# Altium PCB CellVoltageControl.PcbDoc (part 1 of 3)
Units mm, origin at the board's own origin, x right, y up, seen from the top; angles counter-clockwise.
Board outline 100.01 x 50.02 mm, 2 copper layers (Top Layer, Bottom Layer); 240 components, 246 nets, 730 pads, 332 vias.
Unrouted connection lines stored in the file: 5.
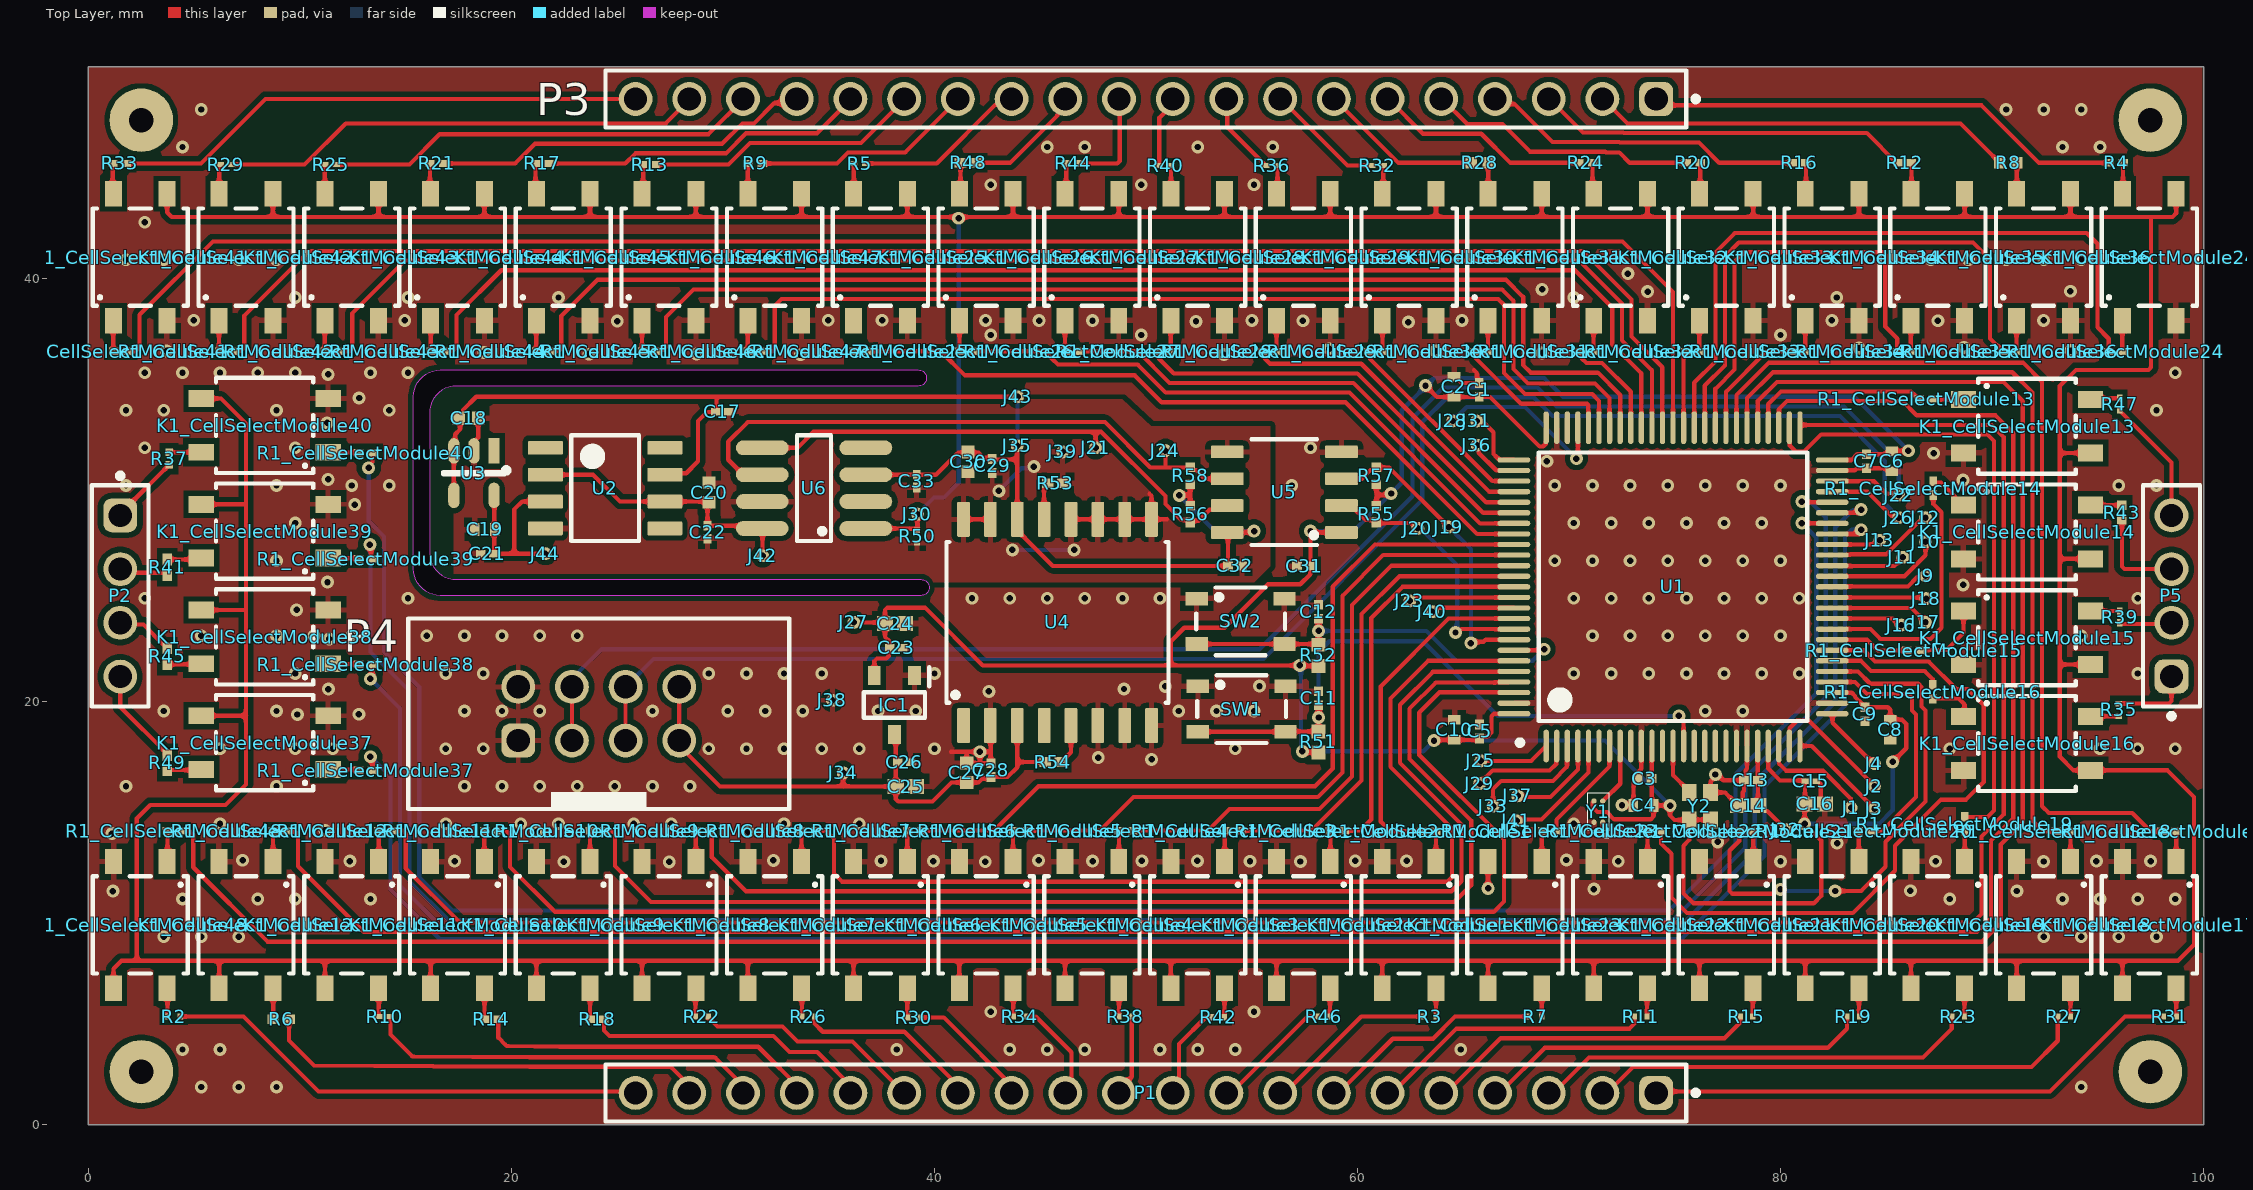
[diagram p0: Top Layer view]
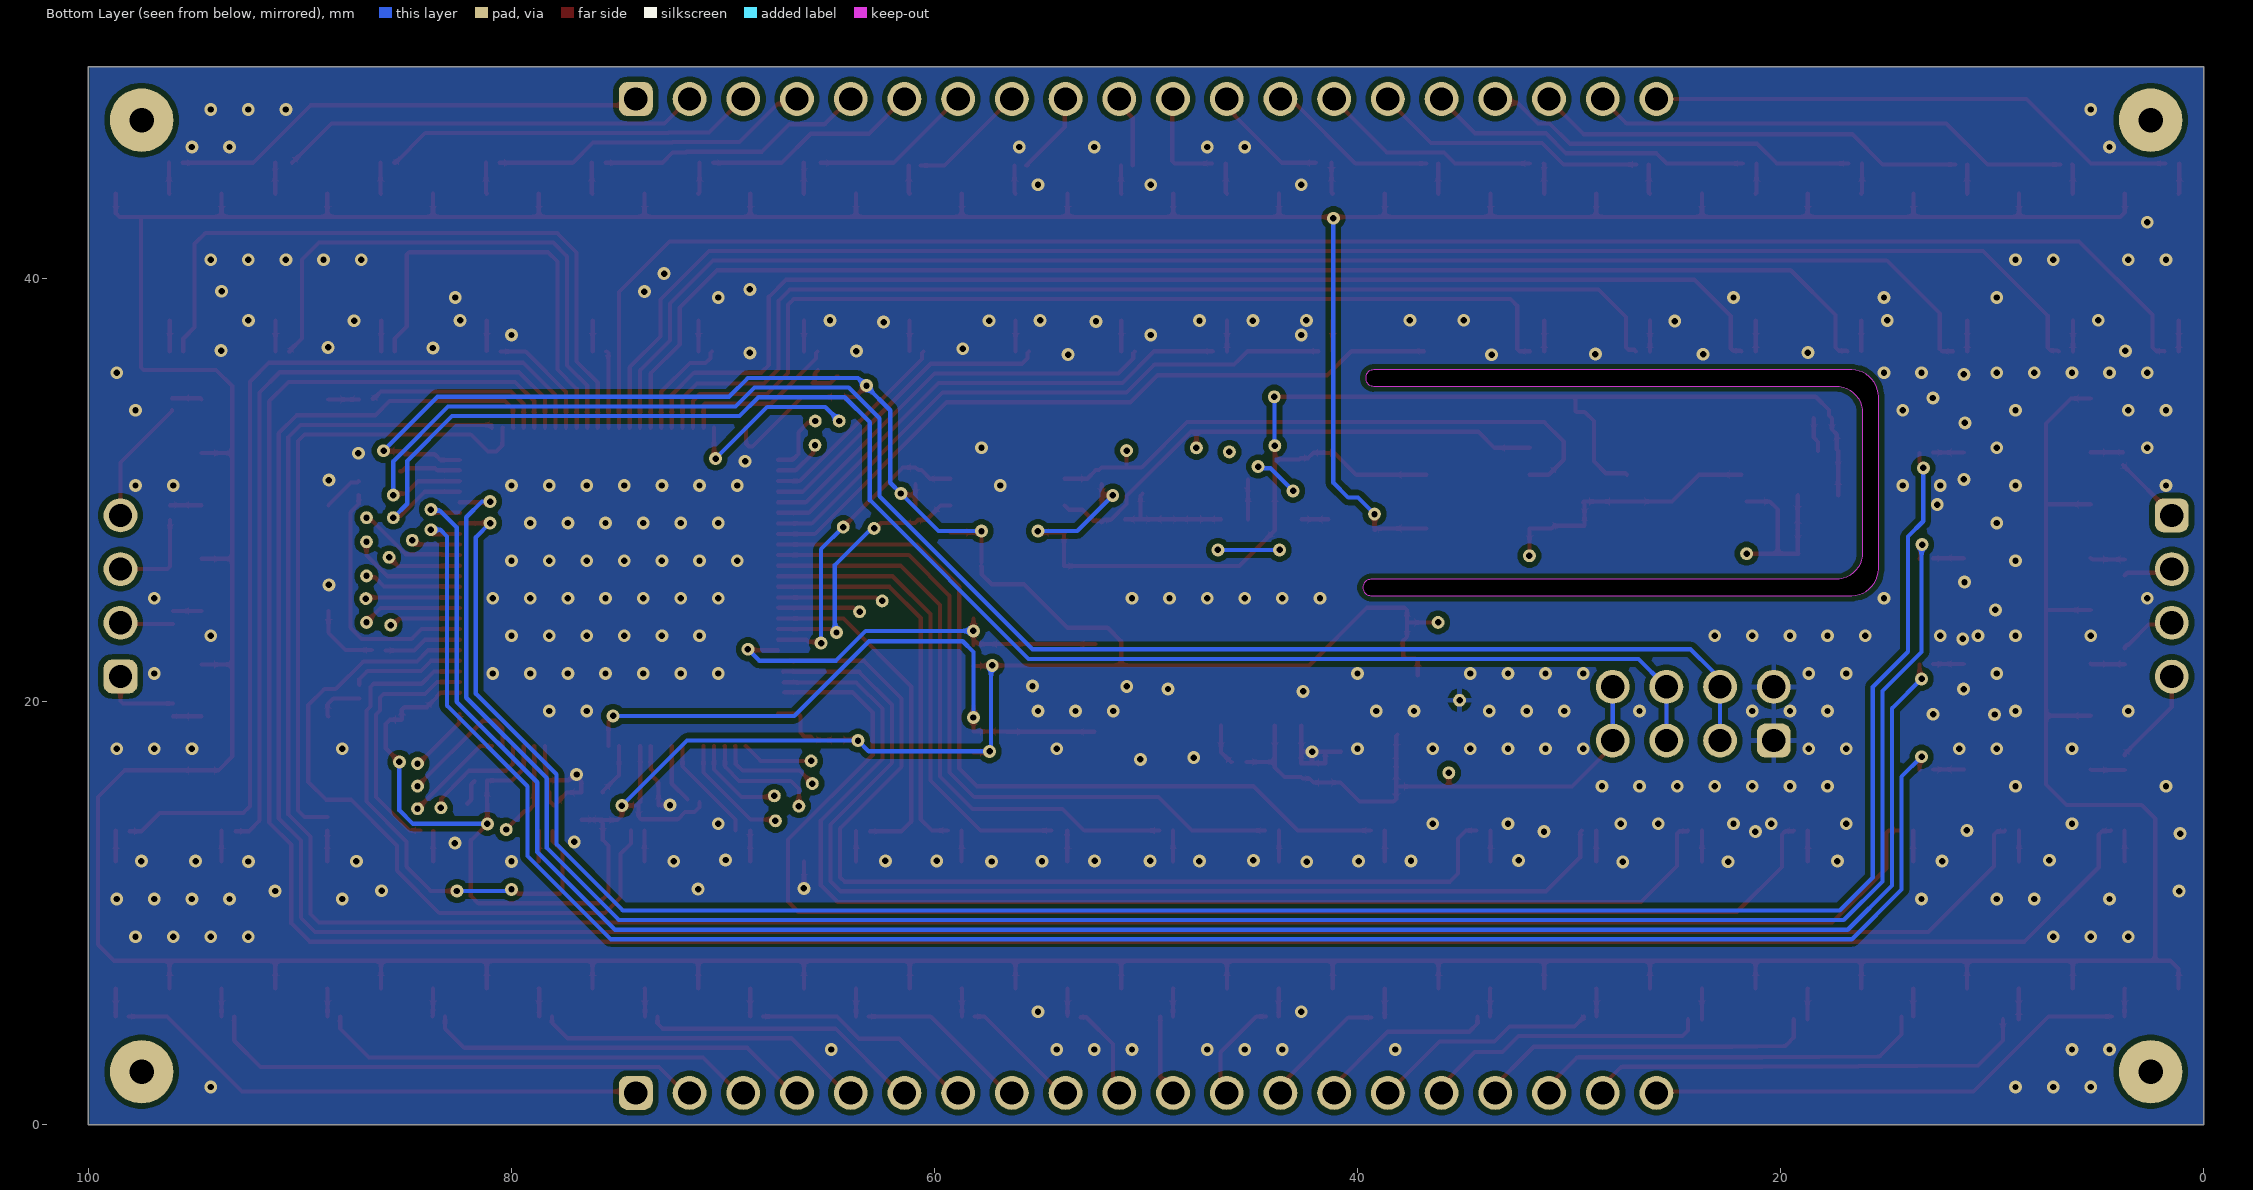
[diagram p1: Bottom Layer view, seen from below]

## Layer stack, top to bottom
Top Solder: solder mask 0.0102, Solder Resist, Dk 3.5
Top Layer: signal copper 0.0356
Dielectric 1: dielectric 0.32, FR-4, Dk 4.8
Bottom Layer: signal copper 0.0356
Bottom Solder: solder mask 0.0102, Solder Resist, Dk 3.5

## Board outline
0,0 100.015,0 100.015,50.021 0,50.021
cut-out: 15.367,26.289 15.367,34.417 cw(c16.637,34.417) 16.637,35.687 39.243,35.687 cw(c39.243,35.306) 39.624,35.306 cw(c39.243,35.306) 39.243,34.925 17.399,34.925 ccw(c17.399,33.655) 16.129,33.655 16.129,27.051 ccw(c17.399,27.051) 17.399,25.781 39.37,25.781 cw(c39.37,25.4) 39.751,25.4 cw(c39.37,25.4) 39.37,25.019 16.637,25.019 cw(c16.637,26.289)

## Design rules (kind name [scope] priority, off if disabled: settings)
Clearance [All] p1: gap=0.254 ignorepadtopadclearanceinfootprint=TRUE except(0: Arc-Hole Track-Hole SMDPad-Hole THPad-Hole Via-Hole Fill-Hole Poly-Hole Region-Hole Text-Hole)
PolygonConnect [All] p1: connectstyle=Relief reliefconductorwidth=0.254 reliefentries=4 polygonreliefangle="90 Angle" airgapwidth=0.254
RoutingVias [All] p1: holewidth=0.305 width=0.61 viastyle="Through Hole" minholewidth=0.3 minwidth=0.6 maxholewidth=1.27 maxwidth=2.54
SolderMaskExpansion [All] p1: expansion=0.102 istentingtop=FALSE
Width [All] p1: maxlimit=12.5 minlimit=0.2 preferedwidth=0.2
30 further rules are at their usual default settings.

## Classes and differential pairs
component class ISO_I2C: C31 C32 R55 R56 R57 R58 U5
component class ISO_5V: C27 C28 C29 C30 R53 R54 U4
component class CellSelectModule6: K1_CellSelectModule6 R1_CellSelectModule6
component class ADC: C33 U6
component class CellSelectModule10: K1_CellSelectModule10 R1_CellSelectModule10
component class LDO_3V3: C23 C24 C25 C26 IC1
component class CellSelectModule48: K1_CellSelectModule48 R1_CellSelectModule48
component class Vref-2v5: C17 C18 C19 C20 C21 C22 J42 J43 J44 U2 U3
channel class CellSelectModule: CellSelectModule1 CellSelectModule2 CellSelectModule3 CellSelectModule4 CellSelectModule5 CellSelectModule6 CellSelectModule7 CellSelectModule8 CellSelectModule9 CellSelectModule10 CellSelectModule11 CellSelectModule12 CellSelectModule13 CellSelectModule14 CellSelectModule15 CellSelectModule16 CellSelectModule17 CellSelectModule18 CellSelectModule19 CellSelectModule20 CellSelectModule21 CellSelectModule22 CellSelectModule23 CellSelectModule24 CellSelectModule25 CellSelectModule26 CellSelectModule27 CellSelectModule28 CellSelectModule29 CellSelectModule30 CellSelectModule31 CellSelectModule32 CellSelectModule33 CellSelectModule34 CellSelectModule35 CellSelectModule36 CellSelectModule37 CellSelectModule38 CellSelectModule39 CellSelectModule40 CellSelectModule41 CellSelectModule42 CellSelectModule43 CellSelectModule44 CellSelectModule45 CellSelectModule46 CellSelectModule47 CellSelectModule48
component class CellVoltageControl: C1 C2 C3 C4 C5 C6 C7 C8 C9 C10 C11 C12 C13 C14 C15 C16 J1 J2 J3 J4 J9 J10 J11 J12 J13 J16 J17 J18 J19 J20 J21 J22 J23 J24 J25 J26 J27 J28 J29 J30 J31 J32 J33 J34 J35 J36 J37 J38 J39 J40 J41 P1 P2 P3 P4 P5 R2 R3 R4 R5 R6 R7 R8 R9 R10 R11 R12 R13 R14 R15 R16 R17 R18 R19 R20 R21 R22 R23 R24 R25 R26 R27 R28 R29 R30 R31 R32 R33 R34 R35 R36 R37 R38 R39 R40 R41 R42 R43 R44 R45 R46 R47 R48 R49 R50 R51 R52 SW1 SW2 U1 Y1 Y2
component class CellSelectModule37: K1_CellSelectModule37 R1_CellSelectModule37
component class CellSelectModule47: K1_CellSelectModule47 R1_CellSelectModule47
component class CellSelectModule46: K1_CellSelectModule46 R1_CellSelectModule46
component class CellSelectModule45: K1_CellSelectModule45 R1_CellSelectModule45
component class CellSelectModule44: K1_CellSelectModule44 R1_CellSelectModule44
component class CellSelectModule43: K1_CellSelectModule43 R1_CellSelectModule43
component class CellSelectModule42: K1_CellSelectModule42 R1_CellSelectModule42
component class CellSelectModule41: K1_CellSelectModule41 R1_CellSelectModule41
component class CellSelectModule40: K1_CellSelectModule40 R1_CellSelectModule40
component class CellSelectModule39: K1_CellSelectModule39 R1_CellSelectModule39
component class CellSelectModule38: K1_CellSelectModule38 R1_CellSelectModule38
component class CellSelectModule36: K1_CellSelectModule36 R1_CellSelectModule36
component class CellSelectModule35: K1_CellSelectModule35 R1_CellSelectModule35
component class CellSelectModule34: K1_CellSelectModule34 R1_CellSelectModule34
component class CellSelectModule33: K1_CellSelectModule33 R1_CellSelectModule33
component class CellSelectModule32: K1_CellSelectModule32 R1_CellSelectModule32
component class CellSelectModule31: K1_CellSelectModule31 R1_CellSelectModule31
component class CellSelectModule30: K1_CellSelectModule30 R1_CellSelectModule30
component class CellSelectModule29: K1_CellSelectModule29 R1_CellSelectModule29
component class CellSelectModule28: K1_CellSelectModule28 R1_CellSelectModule28
component class CellSelectModule27: K1_CellSelectModule27 R1_CellSelectModule27
component class CellSelectModule26: K1_CellSelectModule26 R1_CellSelectModule26
component class CellSelectModule25: K1_CellSelectModule25 R1_CellSelectModule25
component class CellSelectModule24: K1_CellSelectModule24 R1_CellSelectModule24
component class CellSelectModule23: K1_CellSelectModule23 R1_CellSelectModule23
component class CellSelectModule22: K1_CellSelectModule22 R1_CellSelectModule22
component class CellSelectModule21: K1_CellSelectModule21 R1_CellSelectModule21
component class CellSelectModule20: K1_CellSelectModule20 R1_CellSelectModule20
component class CellSelectModule19: K1_CellSelectModule19 R1_CellSelectModule19
component class CellSelectModule18: K1_CellSelectModule18 R1_CellSelectModule18
component class CellSelectModule17: K1_CellSelectModule17 R1_CellSelectModule17
component class CellSelectModule16: K1_CellSelectModule16 R1_CellSelectModule16
component class CellSelectModule15: K1_CellSelectModule15 R1_CellSelectModule15
component class CellSelectModule14: K1_CellSelectModule14 R1_CellSelectModule14
component class CellSelectModule13: K1_CellSelectModule13 R1_CellSelectModule13
component class CellSelectModule12: K1_CellSelectModule12 R1_CellSelectModule12
component class CellSelectModule11: K1_CellSelectModule11 R1_CellSelectModule11
component class CellSelectModule9: K1_CellSelectModule9 R1_CellSelectModule9
component class CellSelectModule7: K1_CellSelectModule7 R1_CellSelectModule7
component class CellSelectModule8: K1_CellSelectModule8 R1_CellSelectModule8
component class CellSelectModule5: K1_CellSelectModule5 R1_CellSelectModule5
component class CellSelectModule4: K1_CellSelectModule4 R1_CellSelectModule4
component class CellSelectModule3: K1_CellSelectModule3 R1_CellSelectModule3
component class CellSelectModule2: K1_CellSelectModule2 R1_CellSelectModule2
component class CellSelectModule1: K1_CellSelectModule1 R1_CellSelectModule1

## Components (designator, comment, footprint, x,y, rotation, side; value= is the part's Value field where it differs from the comment)
C1 "100 nF, 25V, X6S, 0201" CAPC0603X33N 65.765,34.744 r90 top
C2 "4.7 uF, 25V, X5S, 0402" GRM15X 64.567,34.889 r270 top
C3 "100 nF, 25V, X6S, 0201" CAPC0603X33N 73.58,16.368 r180 top
C4 "4.7 uF, 25V, X5S, 0402" GRM15X 73.533,15.092 r0 top
C5 "100 nF, 25V, X6S, 0201" CAPC0603X33N 65.786,18.593 r90 top
C6 "4.7 uF, 25V, X5S, 0402" GRM15X 85.271,31.369 r90 top
C7 "100 nF, 25V, X6S, 0201" CAPC0603X33N 84.074,31.369 r270 top
C8 "4.7 uF, 25V, X5S, 0402" GRM15X 85.2,18.674 r90 top
C9 "100 nF, 25V, X6S, 0201" CAPC0603X33N 84.003,19.408 r270 top
C10 "4.7 uF, 25V, X5S, 0402" GRM15X 64.589,18.669 r270 top
C11 "100 nF, 25V, X6S, 0201" CAPC0603X33N 58.166,20.16 r90 top
C12 "100 nF, 25V, X6S, 0201" CAPC0603X33N 58.162,24.255 r90 top
C13 "100 nF, 25V, X6S, 0201" CAPC0603X33N 78.613,16.285 r180 top
C14 "1uF, 25V, X6S, 0402" FP-GRT155-0_1-IPC_A 78.486,15.09 r180 top
C15 "10nF, 25V, X5R, 0201" FP-GRM033-0_03-IPC_C 81.445,16.248 r0 top
C16 "1uF, 25V, X6S, 0402" FP-GRT155-0_1-IPC_A 81.629,15.172 r0 top
C17 "100nF, 25v, X6S, 0201" FP-GRM033-0_03-IPC_B 29.972,33.71 r0 top
C18 "10 uF, 25V, X6S, 0402" CAPC1005X70N 17.971,33.401 r0 top
C19 "4.7 uF, 25V, X5S, 0402" GRM15X 18.733,28.143 r0 top
C20 "10 uF, 25V, X6S, 0402" CAPC1005X70N 29.346,29.887 r270 top
C21 "100nF, 25v, X6S, 0201" FP-GRM033-0_03-IPC_B 18.86,27 r180 top
C22 "100nF, 25v, X6S, 0201" FP-GRM033-0_03-IPC_B 29.274,28.017 r270 top
C23 "100nF, 25v, X6S, 0201" FP-GRM033-0_03-IPC_B 38.191,22.552 r0 top
C24 "1uF, 25V, X6S, 0402" FP-GRT155-0_1-IPC_A 38.141,23.694 r0 top
C25 "1uF, 25V, X6S, 0402" FP-GRT155-0_1-IPC_A 38.649,15.989 r0 top
C26 "100nF, 25v, X6S, 0201" FP-GRM033-0_03-IPC_B 38.572,17.131 r0 top
C27 "10 uF, 25V, X6S, 0402" CAPC1005X70N 41.529,16.637 r270 top
C28 "100 nF, 25V, X6S, 0201" CAPC0603X33N 42.672,16.764 r270 top
C29 "100 nF, 25V, X6S, 0201" CAPC0603X33N 42.736,31.146 r270 top
C30 "10 uF, 25V, X6S, 0402" CAPC1005X70N 41.593,31.346 r270 top
C31 "100 nF, 25V, X6S, 0201" CAPC0603X33N 57.48,26.416 r180 top
C32 "100 nF, 25V, X6S, 0201" CAPC0603X33N 54.212,26.42 r0 top
C33 "100nF, 25v, X6S, 0201" FP-GRM033-0_03-IPC_B 39.161,30.434 r270 top
IC1 "XC6206P332MR" SOT95P280X130-3N 38.111,19.842 r270 top
J1 "TestPad" TestPad 83.346,14.986 r0 top
J2 "TestPad" TestPad 84.455,16.007 r0 top
J3 "TestPad" TestPad 84.455,14.94 r0 top
J4 "TestPad" TestPad 84.455,17.074 r0 top
J9 "TestPad" TestPad 86.868,25.946 r270 top
J10 "TestPad" TestPad 86.868,27.559 r270 top
J11 "TestPad" TestPad 85.801,26.826 r270 top
J12 "TestPad" TestPad 86.868,28.702 r270 top
J13 "TestPad" TestPad 84.705,27.635 r270 top
J16 "TestPad" TestPad 85.725,23.622 r90 top
J17 "TestPad" TestPad 86.868,23.749 r90 top
J18 "TestPad" TestPad 86.897,24.878 r90 top
J19 "TestPad" TestPad 64.325,28.258 r180 top
J20 "TestPad" TestPad 62.865,28.194 r180 top
J21 "TestPad" TestPad 47.625,32.004 r180 top
J22 "TestPad" TestPad 85.598,29.769 r0 top
J23 "TestPad" TestPad 62.484,24.765 r90 top
J24 "TestPad" TestPad 50.927,31.877 r0 top
J25 "TestPad" TestPad 65.844,17.197 r90 top
J26 "TestPad" TestPad 85.598,28.702 r0 top
J27 "TestPad" TESTPAD#1 36.195,23.749 r0 top
J28 "TestPad" TestPad 64.516,33.274 r90 top
J29 "TestPad" TestPad 65.786,16.129 r90 top
J30 "TestPad" TESTPAD#1 39.202,28.872 r180 top
J31 "TestPad" TestPad 65.645,33.274 r90 top
J32 "TestPad" TESTPAD#1 80.264,13.956 r180 top
J33 "TestPad" TestPad 66.421,15.062 r90 top
J34 "TestPad" TESTPAD#1 35.687,16.637 r180 top
J35 "TestPad" TESTPAD#1 43.914,32.107 r180 top
J36 "TestPad" TestPad 65.659,32.131 r90 top
J37 "TestPad" TestPad 67.582,15.549 r90 top
J38 "TestPad" TESTPAD#1 35.179,20.066 r0 top
J39 "TestPad" TESTPAD#1 46.065,31.814 r0 top
J40 "TestPad" TestPad 63.551,24.257 r0 top
J41 "TestPad" TestPad 67.531,14.365 r90 top
J42 "TestPad" TESTPAD#2 31.877,27.15 r0 top
J43 "TestPad" TESTPAD#1 43.942,34.417 r180 top
J44 "TestPad" TESTPAD#1 21.606,27 r0 top
K1_CellSelectModule1 "AQY280SX" FP-AQY280SX-MFG 62.45,9.444 r270 top (schematic designator K1)
K1_CellSelectModule2 "AQY280SX" FP-AQY280SX-MFG 57.45,9.444 r270 top (schematic designator K1)
K1_CellSelectModule3 "AQY280SX" FP-AQY280SX-MFG 52.45,9.444 r270 top (schematic designator K1)
K1_CellSelectModule4 "AQY280SX" FP-AQY280SX-MFG 47.45,9.444 r270 top (schematic designator K1)
K1_CellSelectModule5 "AQY280SX" FP-AQY280SX-MFG 42.45,9.444 r270 top (schematic designator K1)
K1_CellSelectModule6 "AQY280SX" FP-AQY280SX-MFG 37.45,9.444 r270 top (schematic designator K1)
K1_CellSelectModule7 "AQY280SX" FP-AQY280SX-MFG 32.45,9.444 r270 top (schematic designator K1)
K1_CellSelectModule8 "AQY280SX" FP-AQY280SX-MFG 27.45,9.444 r270 top (schematic designator K1)
K1_CellSelectModule9 "AQY280SX" FP-AQY280SX-MFG 22.45,9.444 r270 top (schematic designator K1)
K1_CellSelectModule10 "AQY280SX" FP-AQY280SX-MFG 17.45,9.444 r270 top (schematic designator K1)
K1_CellSelectModule11 "AQY280SX" FP-AQY280SX-MFG 12.45,9.444 r270 top (schematic designator K1)
K1_CellSelectModule12 "AQY280SX" FP-AQY280SX-MFG 7.45,9.444 r270 top (schematic designator K1)
K1_CellSelectModule13 "AQY280SX" FP-AQY280SX-MFG 91.667,33.025 r0 top (schematic designator K1)
K1_CellSelectModule14 "AQY280SX" FP-AQY280SX-MFG 91.667,28.025 r0 top (schematic designator K1)
K1_CellSelectModule15 "AQY280SX" FP-AQY280SX-MFG 91.667,23.025 r0 top (schematic designator K1)
K1_CellSelectModule16 "AQY280SX" FP-AQY280SX-MFG 91.667,18.025 r0 top (schematic designator K1)
K1_CellSelectModule17 "AQY280SX" FP-AQY280SX-MFG 97.45,9.444 r270 top (schematic designator K1)
K1_CellSelectModule18 "AQY280SX" FP-AQY280SX-MFG 92.45,9.444 r270 top (schematic designator K1)
K1_CellSelectModule19 "AQY280SX" FP-AQY280SX-MFG 87.45,9.444 r270 top (schematic designator K1)
K1_CellSelectModule20 "AQY280SX" FP-AQY280SX-MFG 82.45,9.444 r270 top (schematic designator K1)
K1_CellSelectModule21 "AQY280SX" FP-AQY280SX-MFG 77.45,9.444 r270 top (schematic designator K1)
K1_CellSelectModule22 "AQY280SX" FP-AQY280SX-MFG 72.45,9.444 r270 top (schematic designator K1)
K1_CellSelectModule23 "AQY280SX" FP-AQY280SX-MFG 67.45,9.444 r270 top (schematic designator K1)
K1_CellSelectModule24 "AQY280SX" FP-AQY280SX-MFG 97.45,41.021 r90 top (schematic designator K1)
K1_CellSelectModule25 "AQY280SX" FP-AQY280SX-MFG 37.45,41.021 r90 top (schematic designator K1)
K1_CellSelectModule26 "AQY280SX" FP-AQY280SX-MFG 42.45,41.021 r90 top (schematic designator K1)
K1_CellSelectModule27 "AQY280SX" FP-AQY280SX-MFG 47.45,41.021 r90 top (schematic designator K1)
K1_CellSelectModule28 "AQY280SX" FP-AQY280SX-MFG 52.45,41.021 r90 top (schematic designator K1)
K1_CellSelectModule29 "AQY280SX" FP-AQY280SX-MFG 57.45,41.021 r90 top (schematic designator K1)
K1_CellSelectModule30 "AQY280SX" FP-AQY280SX-MFG 62.45,41.021 r90 top (schematic designator K1)
K1_CellSelectModule31 "AQY280SX" FP-AQY280SX-MFG 67.45,41.021 r90 top (schematic designator K1)
K1_CellSelectModule32 "AQY280SX" FP-AQY280SX-MFG 72.45,41.021 r90 top (schematic designator K1)
K1_CellSelectModule33 "AQY280SX" FP-AQY280SX-MFG 77.45,41.021 r90 top (schematic designator K1)
K1_CellSelectModule34 "AQY280SX" FP-AQY280SX-MFG 82.45,41.021 r90 top (schematic designator K1)
K1_CellSelectModule35 "AQY280SX" FP-AQY280SX-MFG 87.45,41.021 r90 top (schematic designator K1)
K1_CellSelectModule36 "AQY280SX" FP-AQY280SX-MFG 92.45,41.021 r90 top (schematic designator K1)
K1_CellSelectModule37 "AQY280SX" FP-AQY280SX-MFG 8.335,18.064 r180 top (schematic designator K1)
K1_CellSelectModule38 "AQY280SX" FP-AQY280SX-MFG 8.335,23.064 r180 top (schematic designator K1)
K1_CellSelectModule39 "AQY280SX" FP-AQY280SX-MFG 8.335,28.064 r180 top (schematic designator K1)
K1_CellSelectModule40 "AQY280SX" FP-AQY280SX-MFG 8.335,33.064 r180 top (schematic designator K1)
K1_CellSelectModule41 "AQY280SX" FP-AQY280SX-MFG 2.45,41.021 r90 top (schematic designator K1)
K1_CellSelectModule42 "AQY280SX" FP-AQY280SX-MFG 7.45,41.021 r90 top (schematic designator K1)
K1_CellSelectModule43 "AQY280SX" FP-AQY280SX-MFG 12.45,41.021 r90 top (schematic designator K1)
K1_CellSelectModule44 "AQY280SX" FP-AQY280SX-MFG 17.45,41.021 r90 top (schematic designator K1)
K1_CellSelectModule45 "AQY280SX" FP-AQY280SX-MFG 22.45,41.021 r90 top (schematic designator K1)
K1_CellSelectModule46 "AQY280SX" FP-AQY280SX-MFG 27.45,41.021 r90 top (schematic designator K1)
K1_CellSelectModule47 "AQY280SX" FP-AQY280SX-MFG 32.45,41.021 r90 top (schematic designator K1)
K1_CellSelectModule48 "AQY280SX" FP-AQY280SX-MFG 2.45,9.444 r270 top (schematic designator K1)
P1 "61302011121" 61302011121 50,1.5 r180 top
P2 "61300411121" 61300411121 1.5,25 r270 top
P3 "61302011121" 61302011121 50,48.5 r180 top
P4 "61200821621" 61200821621 24.13,19.431 r0 top
P5 "61300411121" 61300411121 98.5,25 r90 top
R1_CellSelectModule1 "430 1%, 0201" RESC0603X26X15NL03T05 63.386,13.874 r0 top (schematic designator R1)
R1_CellSelectModule2 "430 1%, 0201" RESC0603X26X15NL03T05 59.055,13.905 r180 top (schematic designator R1)
R1_CellSelectModule3 "430 1%, 0201" RESC0603X26X15NL03T05 54.158,13.905 r180 top (schematic designator R1)
R1_CellSelectModule4 "430 1%, 0201" RESC0603X26X15NL03T05 49.057,13.905 r180 top (schematic designator R1)
R1_CellSelectModule5 "430 1%, 0201" RESC0603X26X15NL03T05 44.057,13.905 r180 top (schematic designator R1)
R1_CellSelectModule6 "430 1%, 0201" RESC0603X26X15NL03T05 39.057,13.905 r180 top (schematic designator R1)
R1_CellSelectModule7 "430 1%, 0201" RESC0603X26X15NL03T05 34.057,13.905 r180 top (schematic designator R1)
R1_CellSelectModule8 "430 1%, 0201" RESC0603X26X15NL03T05 29.057,13.905 r180 top (schematic designator R1)
R1_CellSelectModule9 "430 1%, 0201" RESC0603X26X15NL03T05 24.057,13.905 r180 top (schematic designator R1)
R1_CellSelectModule10 "430 1%, 0201" RESC0603X26X15NL03T05 19.057,13.905 r180 top (schematic designator R1)
R1_CellSelectModule11 "430 1%, 0201" RESC0603X26X15NL03T05 14.057,13.905 r180 top (schematic designator R1)
R1_CellSelectModule12 "430 1%, 0201" RESC0603X26X15NL03T05 9.057,13.905 r180 top (schematic designator R1)
R1_CellSelectModule13 "430 1%, 0201" RESC0603X26X15NL03T05 86.897,34.325 r0 top (schematic designator R1)
R1_CellSelectModule14 "430 1%, 0201" RESC0603X26X15NL03T05 87.238,30.099 r90 top (schematic designator R1)
R1_CellSelectModule15 "430 1%, 0201" RESC0603X26X15NL03T05 86.306,22.434 r0 top (schematic designator R1)
R1_CellSelectModule16 "430 1%, 0201" RESC0603X26X15NL03T05 87.207,20.473 r270 top (schematic designator R1)
R1_CellSelectModule17 "430 1%, 0201" RESC0603X26X15NL03T05 98.386,13.874 r0 top (schematic designator R1)
R1_CellSelectModule18 "430 1%, 0201" RESC0603X26X15NL03T05 93.386,13.874 r0 top (schematic designator R1)
R1_CellSelectModule19 "430 1%, 0201" RESC0603X26X15NL03T05 88.726,14.224 r270 top (schematic designator R1)
R1_CellSelectModule20 "430 1%, 0201" RESC0603X26X15NL03T05 84.003,13.905 r180 top (schematic designator R1)
R1_CellSelectModule21 "430 1%, 0201" RESC0603X26X15NL03T05 78.386,13.874 r0 top (schematic designator R1)
R1_CellSelectModule22 "430 1%, 0201" RESC0603X26X15NL03T05 74.041,13.905 r180 top (schematic designator R1)
R1_CellSelectModule23 "430 1%, 0201" RESC0603X26X15NL03T05 69.088,13.905 r180 top (schematic designator R1)
R1_CellSelectModule24 "430 1%, 0201" RESC0603X26X15NL03T05 95.86,36.561 r0 top (schematic designator R1)
R1_CellSelectModule25 "430 1%, 0201" RESC0603X26X15NL03T05 36.531,36.572 r180 top (schematic designator R1)
R1_CellSelectModule26 "430 1%, 0201" RESC0603X26X15NL03T05 41.531,36.572 r180 top (schematic designator R1)
R1_CellSelectModule27 "430 1%, 0201" RESC0603X26X15NL03T05 46.531,36.572 r180 top (schematic designator R1)
R1_CellSelectModule28 "430 1%, 0201" RESC0603X26X15NL03T05 50.86,36.561 r0 top (schematic designator R1)
R1_CellSelectModule29 "430 1%, 0201" RESC0603X26X15NL03T05 55.86,36.561 r0 top (schematic designator R1)
R1_CellSelectModule30 "430 1%, 0201" RESC0603X26X15NL03T05 60.86,36.561 r0 top (schematic designator R1)
R1_CellSelectModule31 "430 1%, 0201" RESC0603X26X15NL03T05 65.86,36.561 r0 top (schematic designator R1)
R1_CellSelectModule32 "430 1%, 0201" RESC0603X26X15NL03T05 70.86,36.561 r0 top (schematic designator R1)
R1_CellSelectModule33 "430 1%, 0201" RESC0603X26X15NL03T05 75.86,36.561 r0 top (schematic designator R1)
R1_CellSelectModule34 "430 1%, 0201" RESC0603X26X15NL03T05 80.86,36.561 r0 top (schematic designator R1)
R1_CellSelectModule35 "430 1%, 0201" RESC0603X26X15NL03T05 85.86,36.561 r0 top (schematic designator R1)
R1_CellSelectModule36 "430 1%, 0201" RESC0603X26X15NL03T05 90.86,36.561 r0 top (schematic designator R1)
R1_CellSelectModule37 "430 1%, 0201" RESC0603X26X15NL03T05 13.105,16.764 r180 top (schematic designator R1)
R1_CellSelectModule38 "430 1%, 0201" RESC0603X26X15NL03T05 13.105,21.764 r180 top (schematic designator R1)
R1_CellSelectModule39 "430 1%, 0201" RESC0603X26X15NL03T05 13.105,26.764 r180 top (schematic designator R1)
R1_CellSelectModule40 "430 1%, 0201" RESC0603X26X15NL03T05 13.105,31.764 r180 top (schematic designator R1)
R1_CellSelectModule41 "430 1%, 0201" RESC0603X26X15NL03T05 1.531,36.572 r180 top (schematic designator R1)
R1_CellSelectModule42 "430 1%, 0201" RESC0603X26X15NL03T05 6.531,36.572 r180 top (schematic designator R1)
R1_CellSelectModule43 "430 1%, 0201" RESC0603X26X15NL03T05 11.531,36.572 r180 top (schematic designator R1)
R1_CellSelectModule44 "430 1%, 0201" RESC0603X26X15NL03T05 16.531,36.572 r180 top (schematic designator R1)
R1_CellSelectModule45 "430 1%, 0201" RESC0603X26X15NL03T05 21.531,36.572 r180 top (schematic designator R1)
R1_CellSelectModule46 "430 1%, 0201" RESC0603X26X15NL03T05 26.531,36.572 r180 top (schematic designator R1)
R1_CellSelectModule47 "430 1%, 0201" RESC0603X26X15NL03T05 31.531,36.572 r180 top (schematic designator R1)
R1_CellSelectModule48 "430 1%, 0201" RESC0603X26X15NL03T05 4.057,13.905 r180 top (schematic designator R1)
R2 "1K 1%, 0201" ERJ1GN_(0201) 4.035,5.111 r0 top
R3 "24K9 1%, 0201" ERJ1GN_(0201) 63.418,5.111 r180 top
R4 "51K 1%, 0201" RESC0603X26X15NL03T05 95.882,45.481 r180 top
R5 "76K8 1%, 0201" RESC0603X26X15LL03T05 36.466,45.446 r0 top
R6 "3K 1%, 0201" RESC0603X26X15ML03T05 9.113,4.984 r0 top
R7 "27K 1%, 0201" ERJ1GN_(0201) 68.423,5.111 r180 top
R8 "53K3 1%, 0201" RESC0201(0603)_M 90.787,45.481 r180 top value="53600.00 Ohm"
R9 "78K7 1%, 0201" RESC0603X26X15NL03T05 31.535,45.45 r0 top
R10 "4K99 1%, 0201" RESC0603X26X15LL03T05 14.004,5.111 r0 top
R11 "29K4 1%, 0201" ERJ1GN_(0201) 73.403,5.111 r180 top
R12 "54K9 1%, 0201" RESC0603X26X15NL03T05 85.879,45.481 r180 top
R13 "80K6 1%, 0201" RESC0201(0603)_L 26.53,45.4 r0 top value="80600.00 Ohm"
R14 "6K9 1%, 0201" RESC0603X26X15NL03T05 19.057,4.984 r0 top
R15 "30K9 1%, 0201" ERJ1GN_(0201) 78.402,5.111 r180 top
R16 "57K6 1%, 0201" RESC0603X26X15NL03T05 80.89,45.481 r180 top
R17 "82K5 1%, 0201" RESC0603X26X15NL03T05 21.469,45.45 r0 top
R18 "9K 1%, 0201" RESC0603X26X15NL03T05 24.047,4.984 r0 top
R19 "33K 1%, 0201" ERJ1GN_(0201) 83.451,5.111 r180 top
R20 "59K 1%, 0201" RESC0603X26X15NL03T05 75.889,45.481 r180 top
R21 "84K5 1%, 0201" RESC0603X26X15NL03T05 16.469,45.45 r0 top
R22 "11K 1%, 0201" ERJ1GN_(0201) 29.002,5.111 r0 top
R23 "34K8 1%, 0201" ERJ1GN_(0201) 88.414,5.111 r180 top
R24 "61K9 1%, 0201" RESC0603X26X15NL03T05 70.8,45.481 r180 top
R25 "86K6 1%, 0201" RESC0603X26X15LL03T05 11.451,45.4 r0 top
R26 "13K 1%, 0201" ERJ1GN_(0201) 34.035,5.111 r0 top
R27 "37K4 1%, 0201" ERJ1GN_(0201) 93.424,5.111 r180 top
R28 "63K4 1%, 0201" RESC0201(0603)_M 65.787,45.481 r180 top value="63400.00 Ohm"
R29 "88K7 1%, 0201" RESC0603X26X15LL03T05 6.498,45.4 r0 top
R30 "15K 1%, 0201" ERJ1GJJ2R4C 39.035,5.065 r0 top
R31 "39K 1%, 0201" ERJ1GN_(0201) 98.424,5.111 r180 top
R32 "64K9 1%, 0201" RESC0603X26X15LL03T05 60.95,45.354 r180 top
R33 "91K 1%, 0201" RESC0603X26X15NL03T05 1.468,45.45 r0 top
R34 "17K 1%, 0201" ERJ1GN_(0201) 44.035,5.111 r0 top
R35 "41K2 1%, 0201" ERJ1GN_(0201) 96.013,19.61 r90 top
R36 "69K8 1%, 0201" RESC0603X26X15LL03T05 55.95,45.354 r180 top
R37 "93K 1%, 0201" RESC0201(0603)_L 3.811,31.496 r270 top value="93100.00 Ohm"
R38 "19K 1%, 0201" ERJ1GN_(0201) 49.035,5.111 r0 top
R39 "43K0 1%, 0201" RESC0603X26X15LL03T05 96.047,24.003 r270 top
R40 "71K5 1%, 0201" RESC0603X26X15LL03T05 50.914,45.354 r180 top
R41 "95K3 1%, 0201" RESC0603X26X15ML03T05 3.73,26.352 r270 top
R42 "21K 1%, 0201" ERJ1GN_(0201) 53.414,5.08 r180 top
R43 "45K3 1%, 0201" RESC0201(0603)_N 96.159,28.944 r270 top value="45300.00 Ohm"
R44 "73K2 1%, 0201" RESC0603X26X15NL03T05 46.558,45.45 r0 top
R45 "97K6 1%, 0201" RESC0603X26X15ML03T05 3.73,22.145 r90 top
R46 "23K2 1%, 0201" ERJ1GN_(0201) 58.412,5.111 r180 top
R47 "48K7 1%, 0201" RESC0603X26X15LL03T05 96.059,34.073 r270 top
R48 "75K 1%, 0201" RESC0603X26X15ML03T05 41.609,45.481 r0 top
R49 "100K 1%, 0201" FP-ERJ1GN-IPC_A 3.73,17.118 r90 top
R50 "1K 1%, 0201" ERJ1GN_(0201) 39.18,27.813 r90 top
R51 "10K 5%, 0402" RESC1005X40X25ML05T05 58.162,18.096 r90 top
R52 "10K 5%, 0402" RESC1005X40X25ML05T05 58.162,22.19 r90 top
R53 "RSVD" FP-ERJ1GN-IPC_A 45.72,30.335 r0 top
R54 "100K 1%, 0201" FP-ERJ1GN-IPC_A 45.593,17.145 r180 top
R55 "4K7 1%, 0402" RESC1005X40X25LL05T05 60.903,28.874 r90 top
R56 "4K7 1%, 0402" RESC1005X40X25LL05T05 52.104,28.874 r270 top
R57 "4K7 1%, 0402" RESC1005X40X25LL05T05 60.903,30.678 r270 top
R58 "4K7 1%, 0402" RESC1005X40X25LL05T05 52.104,30.678 r90 top
SW1 "PTS810SJM250SMTRLFS" FP-PTS810SJM250SMTRLFS-MFG 54.533,19.652 r0 top
SW2 "PTS810SJM250SMTRLFS" FP-PTS810SJM250SMTRLFS-MFG 54.479,23.798 r0 top
U1 "STM32L152VBT6ATR" STM-LQFP100_L 74.93,25.432 r90 top
U2 "OPA350UA" D0008A_M 24.431,30.099 r0 top
U3 "LM4132AMF-2.5/NOPB" FP-DBV0005A-IPC_C 18.228,30.809 r270 top
U4 "UCC12040DVER" FP-DVE0016A-MFG 45.824,23.749 r90 top
U5 "ISO1540DR" FP-D0008A-MFG 56.549,29.909 r180 top
U6 "ADS1252U" TI-D8_M 34.31,30.099 r180 top
Y1 "SIT1552AC-JE-DCC-32.768D" FP-SIT1552-J-MFG 71.4,14.802 r90 top
Y2 "ECS-TXO-2016-33-160-TR" FP-TXO-2016-MFG 76.2,15.056 r90 top

## Footprints (in the part's own frame and the unit in brackets; to place one, negate y for a bottom-side part, rotate by r counter-clockwise, add the part's x,y. Pads: shape width x height; smd on the part's side, far side on the other; paste and mask are expansions set on the pad)
61200821621 [mm] "8 pins, straight, gold plating"
  rrect50% 1.6x1.6 hole 1.1: 1(-3.81,-1.27)
  round 1.6 hole 1.1: 2(-3.81,1.27) 3(-1.27,-1.27) 4(-1.27,1.27) 5(1.27,-1.27) 6(1.27,1.27) 7(3.81,-1.27) 8(3.81,1.27)
  silkscreen extent -9.01,-4.5 9.01,4.5, body extent -8.91,-4.42 8.91,4.75, height 9.13
61300411121 [mm] "Pin Header, pitch 2.54 mm, THT, Vertical, single row, 4p"
  rrect50% 1.6x1.6 hole 1.1: 1(-3.81,0)
  round 1.6 hole 1.1: 2(-1.27,0) 3(1.27,0) 4(3.81,0)
  silkscreen extent -5.8,-1.35 5.23,1.35, body extent -5.08,-1.27 5.08,1.27, height 8.57
61302011121 [mm] "Pin Header, pitch 2.54 mm, THT, Vertical, single row, 20p"
  rrect50% 1.6x1.6 hole 1.1: 1(-24.13,0)
  round 1.6 hole 1.1: 2(-21.59,0) 3(-19.05,0) 4(-16.51,0) 5(-13.97,0) 6(-11.43,0) 7(-8.89,0) 8(-6.35,0) 9(-3.81,0) 10(-1.27,0) 11(1.27,0) 12(3.81,0) 13(6.35,0) 14(8.89,0) 15(11.43,0) 16(13.97,0) 17(16.51,0) 18(19.05,0) 19(21.59,0) 20(24.13,0)
  silkscreen extent -26.12,-1.35 25.55,1.35, body extent -25.4,-1.27 25.4,1.27, height 8.57
CAPC0603X33N [mm]
  rect 0.46x0.42 smd: 1(-0.33,0) 2(0.33,0)
  body extent -0.3,-0.15 0.3,0.15, height 0.33
CAPC1005X70N [mm]
  rect 0.6x0.62 smd: 1(-0.46,0) 2(0.46,0)
  body extent -0.5,-0.25 0.5,0.25, height 0.5
D0008A_M [mm] "SOIC, 8-Leads, Body 5x4mm, Pitch 1.27mm, IPC Low Density"
  rrect15% 1.65x0.65 smd: 1(-2.825,1.905) 2(-2.825,0.635) 3(-2.825,-0.635) 4(-2.825,-1.905) 5(2.825,-1.905) 6(2.825,-0.635) 7(2.825,0.635) 8(2.825,1.905)
  silkscreen extent -1.6,-2.5 1.6,2.5, body extent -3,-2.45 3,2.45, height 1.63
ERJ1GJJ2R4C [mm]
  rect 0.275x0.3 smd: 1(-0.313,0) 2(0.313,0)
  body extent -0.3,-0.15 0.3,0.15, height 0.23
ERJ1GN_(0201) [mm]
  rect 0.25x0.3 smd: 1(-0.3,0) 2(0.3,0)
  body extent -0.3,-0.15 0.3,0.15, height 0.23
FP-AQY280SX-MFG [mm]
  rect 1.2x0.8 smd paste+0 mask+0: 1(-3,1.27) 2(-3,-1.27) 3(3,-1.27) 4(3,1.27)
  silkscreen extent -2.3,-2.25 2.3,2.25, body extent -3.7,-2.35 3.7,2.35, height 0.25
FP-D0008A-MFG [mm]
  rrect17% 1.55x0.6 smd paste+0 mask+0: 1(-2.7,1.905) 2(-2.7,0.635) 3(-2.7,-0.635) 4(-2.7,-1.905) 5(2.7,-1.905) 6(2.7,-0.635) 7(2.7,0.635) 8(2.7,1.905)
  silkscreen extent -1.55,-2.5 1.55,2.5, body extent -3.57,-2.75 3.57,2.75, height 0.25
FP-DBV0005A-IPC_C [mm]
  rect 1.205x0.532 smd paste+0 mask+0: 1(-1.05,0.95)
  rrect100% 1.205x0.532 smd paste+0 mask+0: 2(-1.05,0) 3(-1.05,-0.95) 4(1.05,-0.95) 5(1.05,0.95)
  silkscreen extent -0.25,-1.45 0.05,1.65, body extent -1.75,-1.55 1.75,1.55, height 0.25
FP-DVE0016A-MFG [mm]
  rrect17% 1.65x0.6 smd paste+0 mask+0: 1(-4.875,4.445) 2(-4.875,3.175) 3(-4.875,1.905) 4(-4.875,0.635) 5(-4.875,-0.635) 6(-4.875,-1.905) 7(-4.875,-3.175) 8(-4.875,-4.445) 9(4.875,-4.445) 10(4.875,-3.175) 11(4.875,-1.905) 12(4.875,-0.635) 13(4.875,0.635) 14(4.875,1.905) 15(4.875,3.175) 16(4.875,4.445)
  silkscreen extent -3.8,-5.25 3.8,5.25, body extent -5.8,-5.5 5.8,5.5, height 0.25
FP-ERJ1GN-IPC_A [mm]
  rect 0.554x0.463 smd paste+0 mask+0: 1(-0.354,0) 2(0.354,0)
  body extent -0.83,-0.43 0.83,0.43, height 0.25
FP-GRM033-0_03-IPC_B [mm]
  rect 0.454x0.363 smd paste+0 mask+0: 1(-0.304,0) 2(0.304,0)
  body extent -0.68,-0.33 0.68,0.33, height 0.25
FP-GRM033-0_03-IPC_C [mm]
  rect 0.354x0.263 smd paste+0 mask+0: 1(-0.254,0) 2(0.254,0)
  body extent -0.53,-0.27 0.53,0.27, height 0.25
FP-GRT155-0_1-IPC_A [mm]
  rect 0.76x0.712 smd paste+0 mask+0: 1(-0.476,0) 2(0.476,0)
  body extent -1.06,-0.56 1.06,0.56, height 0.25
FP-PTS810SJM250SMTRLFS-MFG [mm]
  rect 1.05x0.65 smd paste+0 mask+0: 1(-2.075,1.075) 2(2.075,1.075) 3(-2.075,-1.075) 4(2.075,-1.075)
  silkscreen extent -2.1,-1.6 2.1,1.6, body extent -2.7,-1.7 2.7,1.7, height 0.25
FP-SIT1552-J-MFG [mm]
  round 0.25 smd paste+0 mask-1000: 1(-0.5,-0.205) 2(0.5,-0.205) 3(0.5,0.205) 4(-0.5,0.205)
  silkscreen extent -1.22,-0.51 0.89,0.51, body extent -1.29,-0.94 1.29,0.94, height 0.25
FP-TXO-2016-MFG [mm]
  rect 0.8x0.7 smd paste+0 mask+0: 1(-0.65,-0.5) 2(0.65,-0.5) 3(0.65,0.5) 4(-0.65,0.5)
  silkscreen extent -1.48,-0.59 -1.32,-0.43, body extent -1.15,-0.89 1.15,1.01, height 0.25
GRM15X [mm]
  rect 0.45x0.6 smd: 1(-0.475,0) 2(0.475,0)
  body extent -0.5,-0.28 0.5,0.27, height 0.5
RESC0201(0603)_L [mm] "Chip Resistor, Body 0.6x0.3mm, IPC High Density"
  rect 0.35x0.35 smd: 1(-0.3,0) 2(0.3,0)
  body extent -0.31,-0.16 0.31,0.16, height 0.3
RESC0201(0603)_M [mm] "Chip Resistor, Body 0.6x0.3mm, IPC Low Density"
  rect 0.55x0.55 smd: 1(-0.4,0) 2(0.4,0)
  body extent -0.31,-0.16 0.31,0.16, height 0.3
RESC0201(0603)_N [mm] "Chip Resistor, Body 0.6x0.3mm, IPC Medium Density"
  rect 0.45x0.45 smd: 1(-0.35,0) 2(0.35,0)
  body extent -0.31,-0.16 0.31,0.16, height 0.3
RESC0603X26X15LL03T05 [mm] "Chip Resistor, 2-Leads, Body 0.60x0.30mm, IPC High Density"
  rect 0.35x0.25 smd: 1(-0.275,0) 2(0.275,0)
  body extent -0.32,-0.16 0.31,0.17, height 0.26
RESC0603X26X15ML03T05 [mm] "Chip Resistor, 2-Leads, Body 0.60x0.30mm, IPC Low Density"
  rect 0.55x0.45 smd: 1(-0.375,0) 2(0.375,0)
  body extent -0.32,-0.16 0.32,0.17, height 0.26
RESC0603X26X15NL03T05 [mm] "Chip Resistor, 2-Leads, Body 0.60x0.30mm, IPC Medium Density"
  rect 0.45x0.35 smd: 1(-0.325,0) 2(0.325,0)
  body extent -0.32,-0.16 0.32,0.17, height 0.26
RESC1005X40X25LL05T05 [mm] "Chip Resistor, 2-Leads, Body 1.05x0.55mm, IPC High Density"
  rect 0.45x0.45 smd: 1(-0.4,0) 2(0.4,0)
  body extent -0.53,-0.28 0.53,0.28, height 0.4
RESC1005X40X25ML05T05 [mm] "Chip Resistor, 2-Leads, Body 1.00x0.50mm, IPC Low Density"
  rect 0.65x0.65 smd: 1(-0.5,0) 2(0.5,0)
  body extent -0.53,-0.27 0.53,0.28, height 0.4
SOT95P280X130-3N [mm]
  rect 0.9x0.6 smd: 1(-1.4,0.95) 2(-1.4,-0.95) 3(1.4,0)
  silkscreen extent -1.79,-1.45 0.6,1.65, body extent -1.4,-1.45 1.4,1.45, height 1.3
STM-LQFP100_L [mm] "Thin QFP, 100-Leads, Body 14x14mm, Pitch 0.5mm, IPC High Density"
  oval 1.55x0.25 smd: 1(-7.525,6) 2(-7.525,5.5) 3(-7.525,5) 4(-7.525,4.5) 5(-7.525,4) 6(-7.525,3.5) 7(-7.525,3) 8(-7.525,2.5) 9(-7.525,2) 10(-7.525,1.5) 11(-7.525,1) 12(-7.525,0.5) 13(-7.525,0) 14(-7.525,-0.5) 15(-7.525,-1) 16(-7.525,-1.5) 17(-7.525,-2) 18(-7.525,-2.5) 19(-7.525,-3) 20(-7.525,-3.5) 21(-7.525,-4) 22(-7.525,-4.5) 23(-7.525,-5) 24(-7.525,-5.5) 25(-7.525,-6) 51(7.525,-6) 52(7.525,-5.5) 53(7.525,-5) 54(7.525,-4.5) 55(7.525,-4) 56(7.525,-3.5) 57(7.525,-3) 58(7.525,-2.5) 59(7.525,-2) 60(7.525,-1.5) 61(7.525,-1) 62(7.525,-0.5) 63(7.525,0) 64(7.525,0.5) 65(7.525,1) 66(7.525,1.5) 67(7.525,2) 68(7.525,2.5) 69(7.525,3) 70(7.525,3.5) 71(7.525,4) 72(7.525,4.5) 73(7.525,5) 74(7.525,5.5) 75(7.525,6)
  oval 0.25x1.55 smd: 26(-6,-7.525) 27(-5.5,-7.525) 28(-5,-7.525) 29(-4.5,-7.525) 30(-4,-7.525) 31(-3.5,-7.525) 32(-3,-7.525) 33(-2.5,-7.525) 34(-2,-7.525) 35(-1.5,-7.525) 36(-1,-7.525) 37(-0.5,-7.525) 38(0,-7.525) 39(0.5,-7.525) 40(1,-7.525) 41(1.5,-7.525) 42(2,-7.525) 43(2.5,-7.525) 44(3,-7.525) 45(3.5,-7.525) 46(4,-7.525) 47(4.5,-7.525) 48(5,-7.525) 49(5.5,-7.525) 50(6,-7.525) 76(6,7.525) 77(5.5,7.525) 78(5,7.525) 79(4.5,7.525) 80(4,7.525) 81(3.5,7.525) 82(3,7.525) 83(2.5,7.525) 84(2,7.525) 85(1.5,7.525) 86(1,7.525) 87(0.5,7.525) 88(0,7.525) 89(-0.5,7.525) 90(-1,7.525) 91(-1.5,7.525) 92(-2,7.525) 93(-2.5,7.525) 94(-3,7.525) 95(-3.5,7.525) 96(-4,7.525) 97(-4.5,7.525) 98(-5,7.525) 99(-5.5,7.525) 100(-6,7.525)
  silkscreen extent -7.49,-6.35 6.35,7.36, body extent -7,-7 7,7, height 1.6
TestPad [mil]
  round 24 hole 12: 1(0,0)
TESTPAD#1 [mil]
  round 24 hole 12: 1(0,0)
TESTPAD#2 [mil]
  round 24 hole 12: 1(0,-9.84)
TI-D8_M [mm] "SOIC, 8-Leads, Body 4.9x3.9mm, Pitch 1.27mm, IPC Low Density"
  oval 2.5x0.7 smd: 1(-2.45,1.905) 2(-2.45,0.635) 3(-2.45,-0.635) 4(-2.45,-1.905) 5(2.45,-1.905) 6(2.45,-0.635) 7(2.45,0.635) 8(2.45,1.905)
  silkscreen extent -0.8,-2.5 0.8,2.5, body extent -2,-2.5 2,2.5, height 1.75

## Part data
C1 C3 C5 C7 C9 C11 C12 C13 C28 C29 C31 C32: library part GRM033C81E104KE14D, "Capacitor", Manufacturer_Name="Murata Electronics", Mouser Part Number=81-GRM33C81E104KE14D, Arrow Part Number=GRM033C81E104KE14D, Arrow Price/Stock=https://www.arrow.com/en/products/grm033c81e104ke14d/murata-manufacturing, Datasheet Link=https://search.murata.co.jp/Ceramy/image/img/A01X/G101/ENG/GRM033C81E104KE14-01A.pdf, Height=0.33mm, Manufacturer_Part_Number=GRM033C81E104KE14D, Mouser Price/Stock=https://www.mouser.co.uk/ProductDetail/Murata-Electronics/GRM033C81E104KE14D?qs=P%2FC4Eoq9CDwxe7d5nXqGrA%3D%3D
C2 C4 C6 C8 C10 C19: library part GRM155C61E475ME15J, "Capacitor", Manufacturer_Name="Murata Electronics", Mouser Part Number=81-GRM15C61E475ME15J, Arrow Part Number=GRM155C61E475ME15J, Arrow Price/Stock=https://www.arrow.com/en/products/grm155c61e475me15j/murata-manufacturing?region=nac, Datasheet Link=https://search.murata.co.jp/Ceramy/image/img/A01X/G101/ENG/GRM155C61E475ME15-01A.pdf, Height=0.33mm, Manufacturer_Part_Number=GRM155C61E475ME15J, Mouser Price/Stock=https://www.mouser.co.uk/ProductDetail/Murata-Electronics/GRM155C61E475ME15J?qs=By6Nw2ByBD02p8xq06vhEQ%3D%3D
C14 C16 C24 C25: library part CMP-06035-047663-1, "Multi-Layer Ceramic Capacitor 1uF 25V X6S ±10% 0402 Paper T/R"
C15: library part CMP-2010-01269-2, "Chip Multilayer Ceramic Capacitors for General Purpose, 0201, 10000pF, X5R, 15%, 10%, 25V", Capacitance=10nF, Case Code (Imperial)=0201, Case Code (Metric)=0603, Dielectric=X5R, Max Operating Temperature=85°C, Min Operating Temperature=-55°C, Package Quantity=15000, Tolerance=10%, Voltage=25V, Case/Package=0201, Depth=0.3mm, Height=0.3mm, Lead Free="Lead Free", Length=0.6mm, Mount="Surface Mount", Packaging="Tape and Reel", REACH SVHC="No SVHC", Termination=SMD/SMT, Thickness=0.013inch, Voltage Rating=25V, Voltage Rating (DC)=25V, Weight=1.2E-05oz, Width=0.3mm
C17 C21 C22 C23 C26 C33: library part CMP-06035-023320-1, "Chip Multilayer Ceramic Capacitors for General Purpose, 0201, 0.10uF, X6S, 22%, 10%, 25V", Capacitance=100nF, Case Code (Imperial)=0201, Case Code (Metric)=0603, Dielectric=X6S, Max Operating Temperature=105°C, Min Operating Temperature=-55°C, Package Quantity=15000, Tolerance=10%, Voltage Rating=25V, Case/Package=0201, Height=0.3mm, Length=0.024inch, Mount="Surface Mount", Packaging="Tape and Reel", Termination=SMD/SMT, Thickness=0.013inch, Voltage Rating (DC)=25V, Weight=1.2E-05oz, Width=0.3mm
C18 C20 C27 C30: library part GRM155F51E104ZA01E, "Capacitor", Manufacturer_Name="Murata Electronics", Mouser Part Number=81-GRM15F51E104ZA01E, Datasheet Link=http://www.murata.com/~/media/webrenewal/support/library/catalog/products/capacitor/mlcc/c02e.pdf, Height=0.7mm, Manufacturer_Part_Number=GRM155F51E104ZA01E, Mouser Price/Stock=https://www.mouser.com/Search/Refine.aspx?Keyword=81-GRM15F51E104ZA01E
IC1: "Integrated Circuit", Manufacturer_Name=Torex, Mouser Part Number=N/A, Datasheet Link=http://www.torexsemi.com/products/voltage_regulators/data/XC6206.pdf, Height=1.3mm, Manufacturer_Part_Number=XC6206P332MR, Mouser Price/Stock=https://www.mouser.co.uk/ProductDetail/Torex-Semiconductor/XC6206P332MR?qs=TiOZkKH1s2Qxu69VLzzkSQ%3D%3D
J1 J2 J3 J4 J9 J10 J11 J12 J13 J16 J17 J18 J19 J20 J21 J22 J23 J24 J25 J26 J27 J28 J29 J30 J31 J32 J33 J34 J35 J36 J37 J38 J39 J40 J41 J42 J43 J44: library part 61300111121, "Connector", Manufacturer_Name="Wurth Elektronik", Mouser Part Number=710-61300111121, Datasheet Link=https://katalog.we-online.de/em/datasheet/6130xx11121.pdf, Height=8.89mm, Manufacturer_Part_Number=61300111121, Mouser Price/Stock=https://www.mouser.co.uk/ProductDetail/Wurth-Elektronik/61300111121?qs=PhR8RmCirEaRH5Ck%252B2lRLQ%3D%3D
K1_CellSelectModule1 K1_CellSelectModule2 K1_CellSelectModule3 K1_CellSelectModule4 K1_CellSelectModule5 K1_CellSelectModule6 K1_CellSelectModule7 K1_CellSelectModule8 K1_CellSelectModule9 K1_CellSelectModule10 K1_CellSelectModule11 K1_CellSelectModule12 K1_CellSelectModule13 K1_CellSelectModule14 K1_CellSelectModule15 K1_CellSelectModule16 K1_CellSelectModule17 K1_CellSelectModule18 K1_CellSelectModule19 K1_CellSelectModule20 K1_CellSelectModule21 K1_CellSelectModule22 K1_CellSelectModule23 K1_CellSelectModule24 K1_CellSelectModule25 K1_CellSelectModule26 K1_CellSelectModule27 K1_CellSelectModule28 K1_CellSelectModule29 K1_CellSelectModule30 K1_CellSelectModule31 K1_CellSelectModule32 K1_CellSelectModule33 K1_CellSelectModule34 K1_CellSelectModule35 K1_CellSelectModule36 K1_CellSelectModule37 K1_CellSelectModule38 K1_CellSelectModule39 K1_CellSelectModule40 K1_CellSelectModule41 K1_CellSelectModule42 K1_CellSelectModule43 K1_CellSelectModule44 K1_CellSelectModule45 K1_CellSelectModule46 K1_CellSelectModule47 K1_CellSelectModule48: library part CMP-00287-00695349-1, "AQY280SX AQY Photomos Series 120 mA 350 V 25 Ohm SMT 1 Channel Solid State Relay -SOP-4", Case/Package=SOP, Forward Current=50mA, Isolation Voltage=1.5kV, Load Current=120mA, Max Operating Temperature=85°C, Max Output Voltage=350V, Min Operating Temperature=-40°C, Resistance=25Ω, Height=2.1mm, Input Current=50mA, Lead Free="Lead Free", Length=4.4mm, Max Input Current=50mA, Max Output Current=120mA, Mount="Surface Mount", NexarPartId=695349, Number of Pins=4, Output Current=120mA, Output Voltage=350V, Radiation Hardening=No, Relay Type=Relay, RoHS=Compliant, Termination="Gull Wing", Throw Configuration="DPST, SPST", Width=4.3mm
P1 P3: library part CMP-1502-01102-3, Color=Black, Contact Resistance=20mΩ, Current Rating=3A, Operating Supply Voltage=250V, Connector Type="Male Pin", Contact Material=Copper, Contact Mating Length=5.9944mm, Contact Plating=Gold, Gender=Male, Lead Pitch=2.54mm, Mount="Through Hole", NexarPartId=32855554, Number of Contacts=20, Number of Pins=20, Number of Positions=20, Number of Rows=1, Orientation=Vertical, Packaging=Bulk, Pitch=2.54mm, REACH SVHC=Unknown, RoHS=Compliant, Termination=Solder
P2 P5: library part CMP-1502-01064-3, Color=Black, Contact Resistance=20mΩ, Current Rating=3A, Max Operating Temperature=105°C, Min Operating Temperature=-40°C, Operating Supply Voltage=250V, Connector Type="Male Pin", Contact Material=Copper, Contact Mating Length=5.9944mm, Contact Plating=Gold, Gender=Male, Height=8.89mm, Lead Free="Lead Free", Lead Pitch=2.54mm, Mount="Through Hole", NexarPartId=32855522, Number of Contacts=4, Number of Pins=4, Number of Positions=4, Number of Rows=1, Orientation=Vertical, Packaging=Bulk, Pitch=2.54mm, REACH SVHC=Unknown, RoHS=Compliant, Termination=Solder, Voltage Rating=250V
P4: library part CMP-1502-00006-2, Color=Black, Contact Resistance=20mΩ, Current Rating=3A, Insulation Resistance=1GΩ, Max Operating Temperature=105°C, Min Operating Temperature=-40°C, Operating Supply Voltage=250V, Connector Type="Male Pin", Contact Material=Copper, Contact Plating=Gold, Gender=Male, Insulation Material=PBT, Lead Pitch=2.54mm, Length=17.82mm, Mount="Through Hole", NexarPartId=32855460, Number of Contacts=8, Number of Pins=8, Number of Positions=8, Number of Rows=2, Orientation=Vertical, Pitch=2.54mm, REACH SVHC=Unknown, RoHS=Compliant, Row Spacing=2.54mm, Termination=Solder